# EAGLE board wire_send (EAGLE 7.6.0)
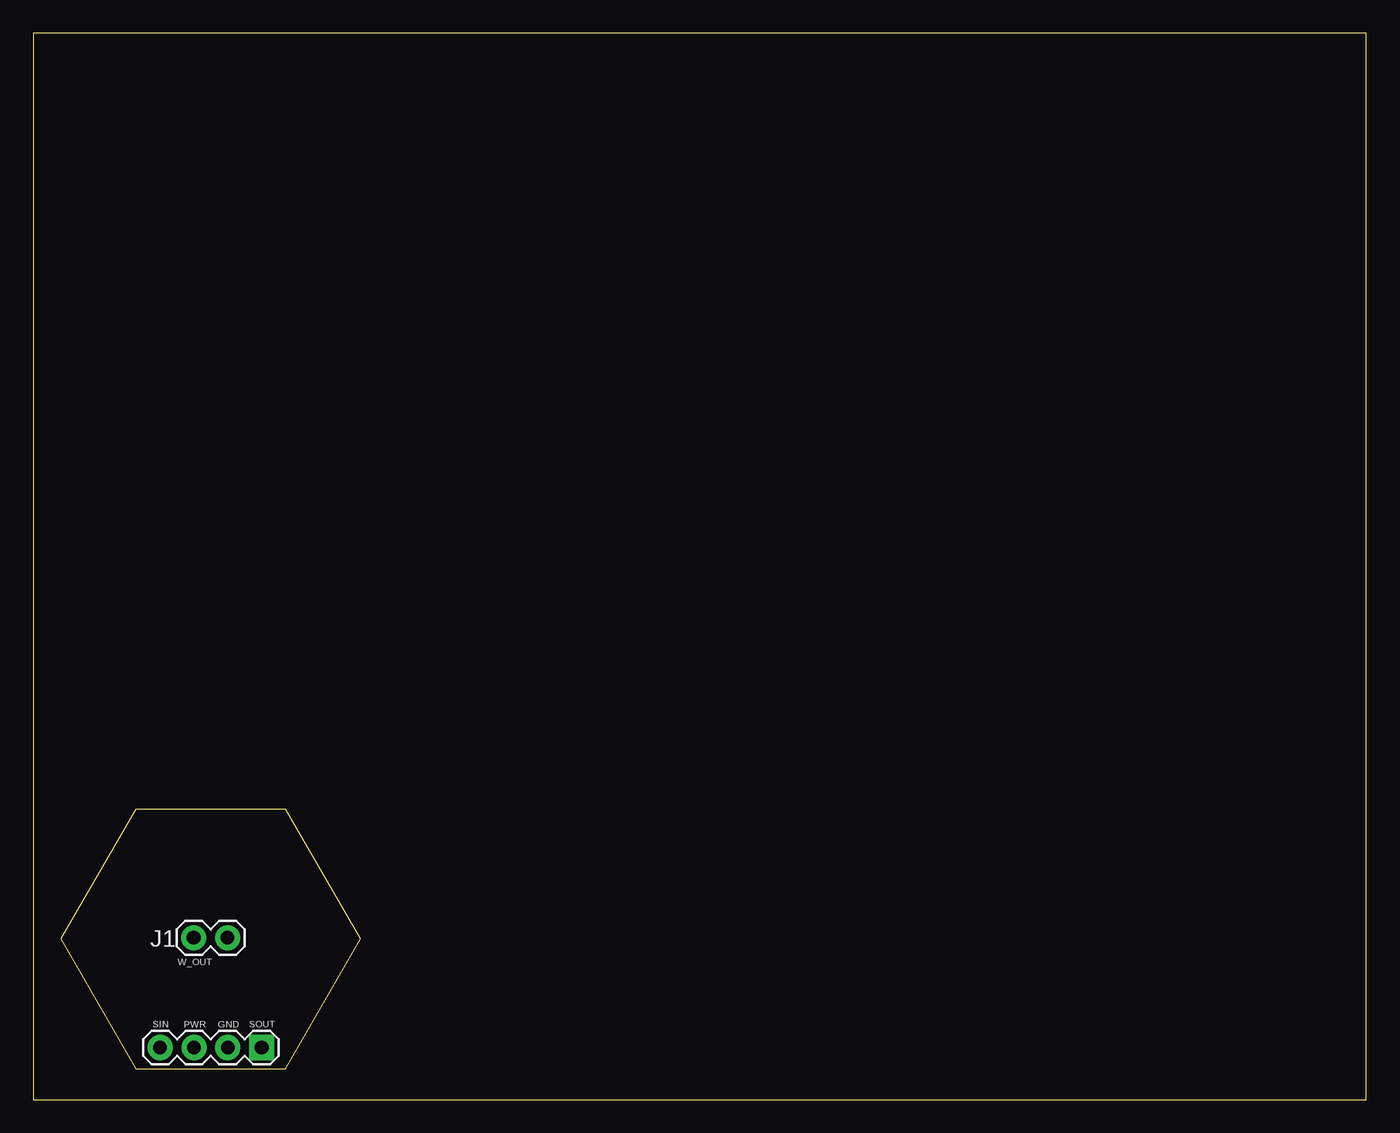
[diagram p0: board, top side]
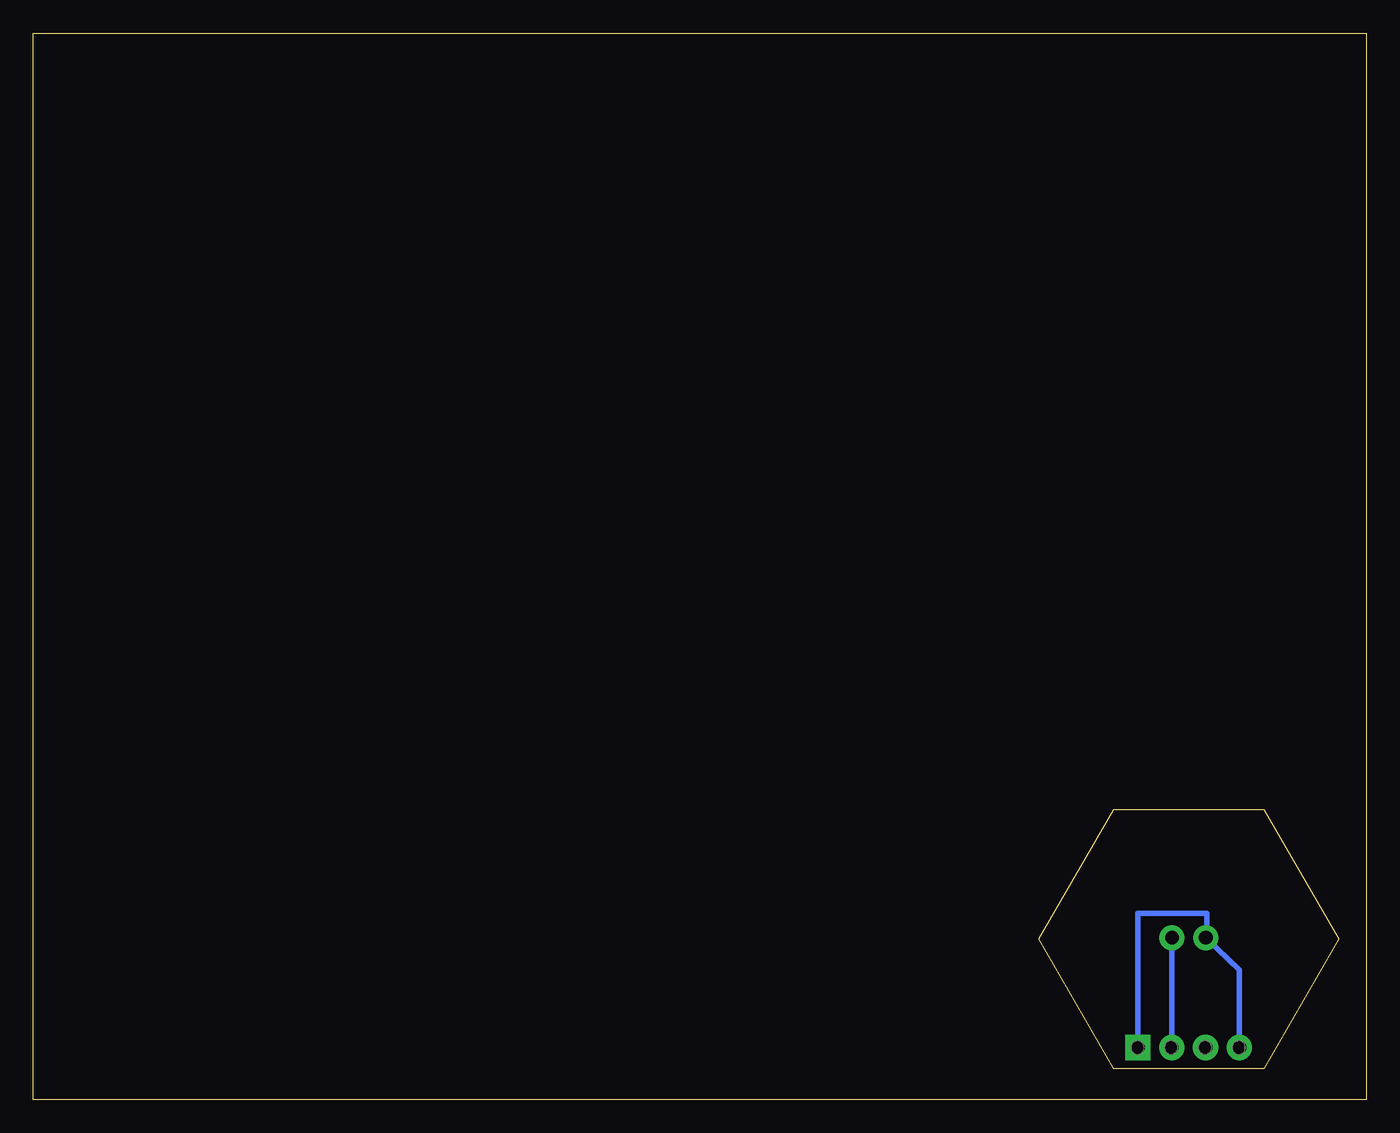
[diagram p1: board, bottom side, seen from below]

Size 100 x 80 mm. Coordinates in mm from the lower left corner, seen from the top.
Outline: 0,0 100,0 100,80 0,80 0,0
Outline: 7.69,2.3 18.94,2.3 24.56,12.04 18.94,21.78 7.69,21.78 2.06,12.04 7.69,2.3
Copper layers (1*16): Top 0.035mm / dielectric 1.5mm / Bottom 0.035mm
Design rules "default *": minimum track width 10mil, minimum drill 24mil, track to track 8mil, track to pad 8mil, pad to pad 8mil, via to via 8mil, smd to smd 8mil, copper to edge 0mil, drill to drill 8mil, minimum pad ring 10mil, minimum via ring 8mil, stop-mask expansion 4mil, vias tented up to drill 0mil, thermal gap 10mil

## Footprints (pad centres in the part's own frame; a part is rotated, then mirrored left to right if it is on the bottom)
1X02 = drill 1.016 pad 1.88: 1 0,0; 2 2.54,0
1X04 = drill 1.016 pad 1.88 square: 1 0,0 | drill 1.016 pad 1.88: 2 2.54,0; 3 5.08,0; 4 7.62,0

## Placement (x,y rotation side)
J1  [1X02]  14.57,12.14 180 top
JP1  [1X04]  17.13,3.9 180 top

## Library data of the parts
J1 JP1 = SparkFun-Connectors

## Nets
1X3SIN-SOUT: J1.2 JP1.1 JP1.4
GND: J1.1 JP1.2
VCC: JP1.3

## Tracks (layer width: path | path; a pad name or v marks a point on that pad's centre or on a via)
1X3SIN-SOUT
  Bottom 0.406: JP1.4 9.51,9.72 J1.2 11.96,12.11 11.96,13.98 17.13,13.98 JP1.1
GND
  Bottom 0.406: J1.1 14.59,12.14 JP1.2

## Text on the board
tPlace: W_OUT | SIN | PWR | GND | SOUT